# EAGLE board SchematicEagle (EAGLE 6.5.0)
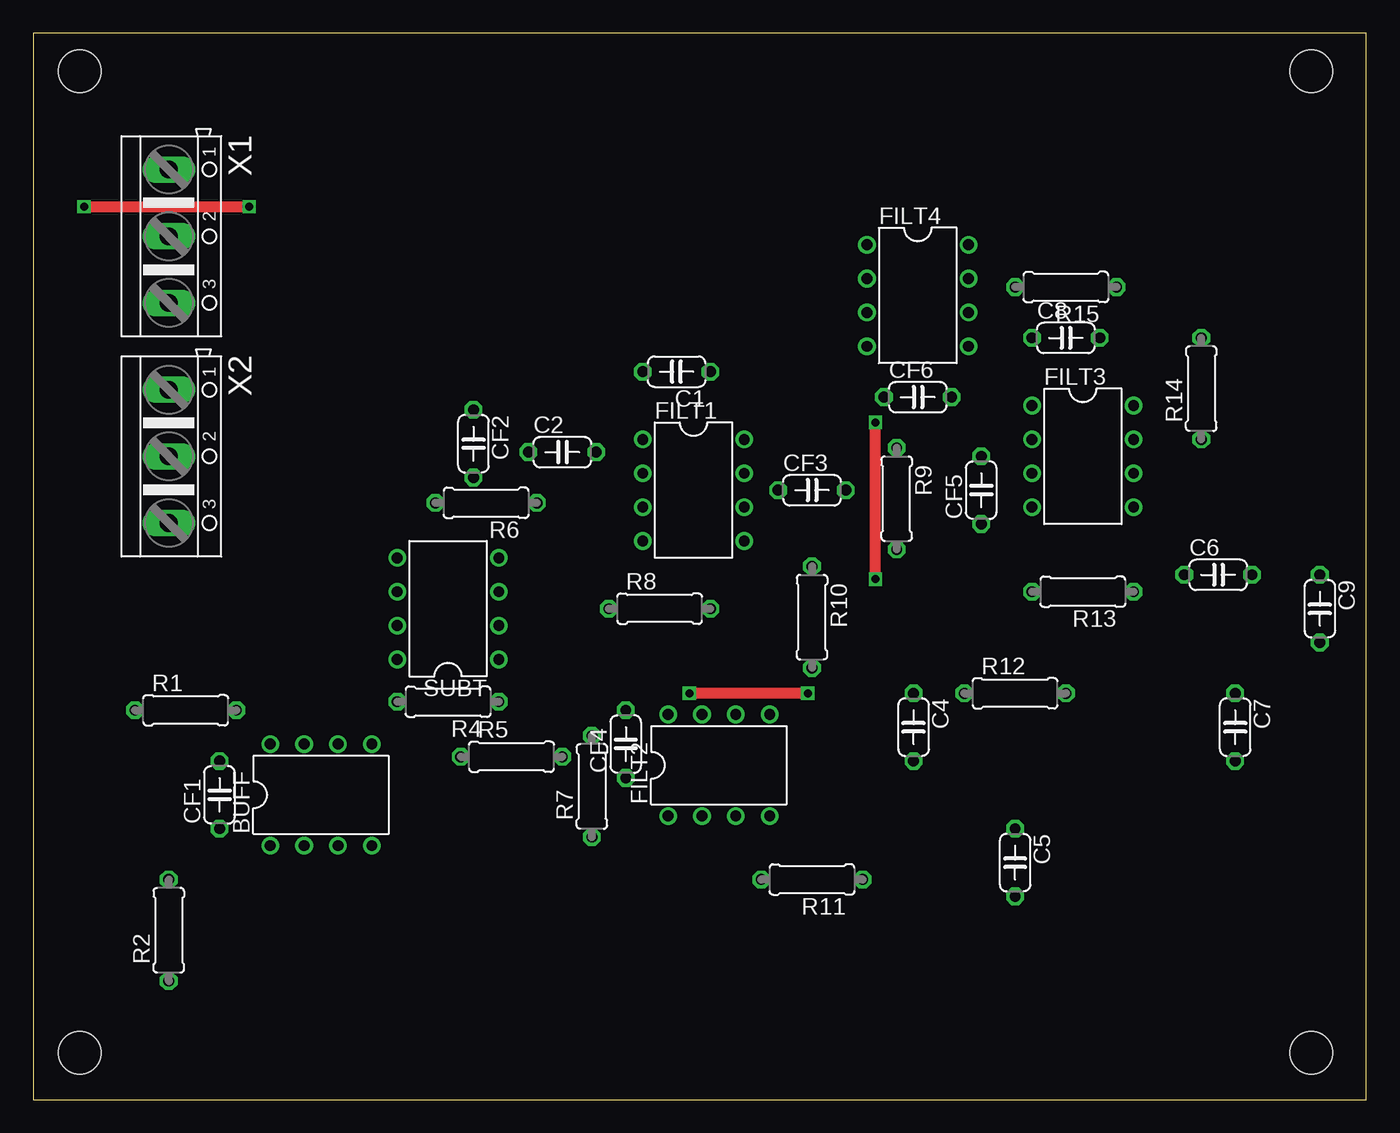
[diagram p0: board, top side]
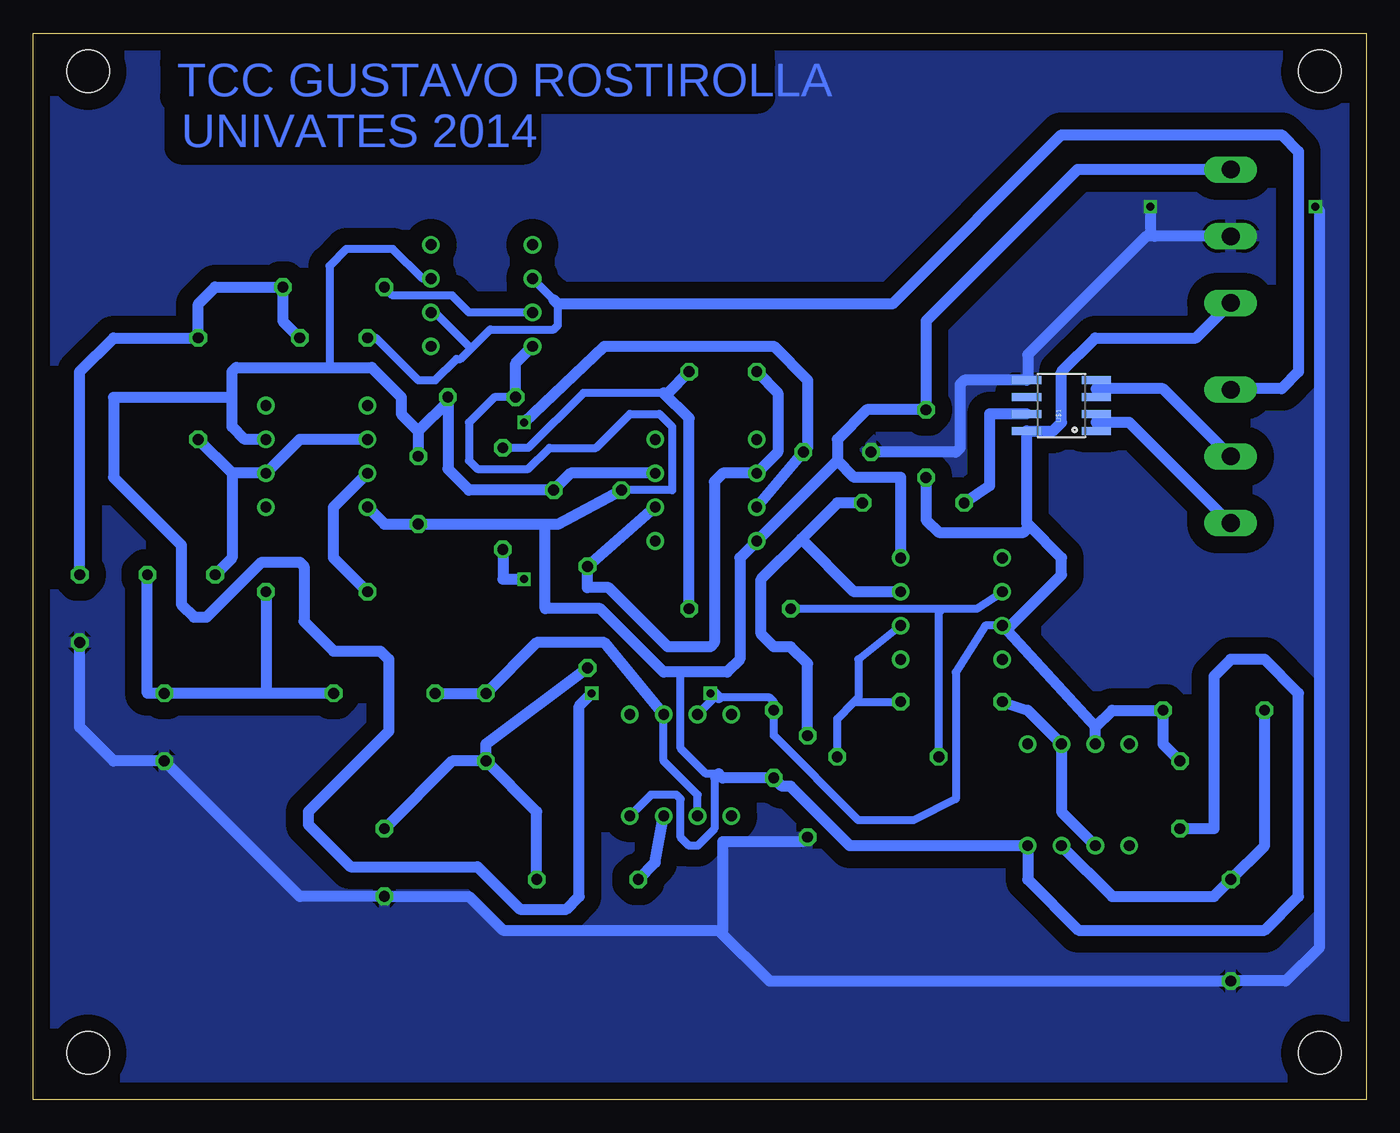
[diagram p1: board, bottom side, seen from below]

Size 100 x 80 mm. Coordinates in mm from the lower left corner, seen from the top.
Outline: 0,0 100,0 100,80 0,80 0,0
Copper layers (1*16): Top 0.035mm / dielectric 1.5mm / Bottom 0.035mm
Design rules "default": minimum track width 10mil, minimum drill 24mil, track to track 8mil, track to pad 8mil, pad to pad 8mil, via to via 8mil, smd to smd 8mil, copper to edge 40mil, drill to drill 8mil, minimum pad ring 10mil, minimum via ring 8mil, stop-mask expansion 4mil, vias tented up to drill 0mil, thermal gap 10mil
Holes 3.2 mm at 3.49,77.15 95.89,77.15 95.89,3.49 3.49,3.49

## Footprints (pad centres in the part's own frame; a part is rotated, then mirrored left to right if it is on the bottom)
DIL08 = drill 0.813 pad 1.27: 1 -3.81,-3.81; 2 -1.27,-3.81; 3 1.27,-3.81; 4 3.81,-3.81; 5 3.81,3.81; 6 1.27,3.81; 7 -1.27,3.81; 8 -3.81,3.81
C050-024X044 = drill 0.813 octagon: 1 -2.54,0; 2 2.54,0
0207/7 = drill 0.813 octagon: 1 -3.81,0; 2 3.81,0
SO08 = smd 0.61 x 2.21: 1 -1.905,-2.616; 2 -0.635,-2.616; 3 0.635,-2.616; 4 1.905,-2.616; 5 1.905,2.616; 6 0.635,2.616; 7 -0.635,2.616; 8 -1.905,2.616
AK500/3 = drill 1.321 long: 1 -5.004,0; 2 0,0; 3 5.004,0

## Placement (x,y rotation side)
BUFF  OP07DN  [DIL08]  21.59,22.86 0 top
C1  15nF  [C050-024X044]  48.26,54.61 180 top
C2  10nF  [C050-024X044]  39.69,48.58 0 top
C4  15nF  [C050-024X044]  66.04,27.94 270 top
C5  10nF  [C050-024X044]  73.66,17.78 270 top
C6  33nF  [C050-024X044]  88.9,39.37 0 top
C7  10nF  [C050-024X044]  90.17,27.94 270 top
C8  330nF  [C050-024X044]  77.47,57.15 0 top
C9  10nF  [C050-024X044]  96.52,36.83 270 top
CF1  100nF  [C050-024X044]  13.97,22.86 90 top
CF2  100nF  [C050-024X044]  33.02,49.21 270 top
CF3  100nF  [C050-024X044]  58.42,45.72 0 top
CF4  100nF  [C050-024X044]  44.45,26.67 90 top
CF5  100nF  [C050-024X044]  71.12,45.72 90 top
CF6  100nF  [C050-024X044]  66.36,52.7 0 top
FILT1  OP07DN  [DIL08]  49.53,45.72 270 top
FILT2  OP07DN  [DIL08]  51.44,25.08 0 top
FILT3  OP07DN  [DIL08]  78.74,48.26 270 top
FILT4  OP07DN  [DIL08]  66.36,60.33 270 top
R1  10K  [0207/7]  11.43,29.21 0 top
R2  10K  [0207/7]  10.16,12.7 90 top
R4  20K  [0207/7]  31.11,29.84 180 top
R5  20K  [0207/7]  35.88,25.72 0 top
R6  20K  [0207/7]  33.97,44.77 180 top
R7  20K  [0207/7]  41.91,23.5 90 top
R8  8,2K  [0207/7]  46.99,36.83 0 top
R9  33K  [0207/7]  64.77,45.09 270 top
R10  15K  [0207/7]  58.42,36.2 270 top
R11  18K  [0207/7]  58.42,16.51 180 top
R12  10K  [0207/7]  73.66,30.48 0 top
R13  12K  [0207/7]  78.74,38.1 180 top
R14  2.2K  [0207/7]  87.63,53.34 90 top
R15  5.6K  [0207/7]  77.47,60.96 180 top
SUBT  OP07DN  [DIL08]  31.11,36.83 90 top
U$1  ACS712  [SO08]  22.86,52.07 90 bottom
X1  [AK500/3]  10.16,64.77 270 top
X2  [AK500/3]  10.16,48.26 270 top

## Library data of the parts
BUFF FILT1-FILT4 SUBT = linear
C1 C2 C4-C9 CF1-CF6 R1 R2 R4-R15 = rcl
U$1 = 1_SparkFun
X1 X2 = con-ptr500; OC_FARNELL: unknown; OC_NEWARK: unknown

## Nets
+IP_S: U$1.1 U$1.2 X2.3
+VCC: BUFF.7 CF1.2 CF2.2 CF3.2 CF4.2 CF5.2 CF6.2 FILT1.7 FILT2.7 FILT3.7 FILT4.7 R1.2 SUBT.7 U$1.8 X1.3
-IP_S: U$1.3 U$1.4 X2.2
-VCC: BUFF.4 CF1.1 CF2.1 CF3.1 CF4.1 CF5.1 CF6.1 FILT1.4 FILT2.4 FILT3.4 FILT4.4 SUBT.4 X1.1
GND: C2.1 C5.2 C7.2 C9.2 R2.1 R7.1 U$1.5 X1.2
IN_F: R5.1 R8.1 SUBT.6
N$1: BUFF.3 R1.1 R2.2
N$2: C1.1 R8.2 R9.1
N$3: R4.1 R5.2 SUBT.2
N$4: C2.2 FILT1.3 R9.2
N$5: R6.1 R7.2 SUBT.3
N$6: C1.2 FILT1.2 FILT1.6 R10.1
N$7: BUFF.2 BUFF.6 R4.2
N$8: C4.2 C5.1 R10.2 R11.1
N$9: C4.1 FILT2.2 FILT2.6 R12.1
N$10: FILT2.3 R11.2
N$11: C6.2 C7.1 R12.2 R13.1
N$12: C6.1 FILT3.2 FILT3.6 R14.1
N$13: FILT3.3 R13.2
N$15: C8.2 C9.1 R14.2 R15.1
N$17: FILT4.3 R15.2
OUT_F: C8.1 FILT4.2 FILT4.6 X2.1
OUT_I: R6.2 U$1.7

## Tracks (layer width: path | path; a pad name or v marks a point on that pad's centre or on a via)
+IP_S
  Bottom 0.61: U$1.2 20.24,50.8 U$1.1
  Bottom 0.813: X2.3 10.24,43.26 17.78,50.8 20.24,50.8
+VCC  (via drill 0.6 pad 0.61)
  Top 0.813: v58.1,30.48 v49.21,30.48
  Bottom 0.61: FILT4.7 70.8,61.59 73.03,63.82 76.52,63.82 77.79,62.55 77.79,54.93 | SUBT.7 28.57,35.56 30.8,32.07 30.8,22.54 33.97,20.95 38.1,20.95 44.45,27.3 CF4.2 44.45,29.84 44.77,30.16 48.58,30.16 48.9,30.16 FILT2.7 | U$1.8 25.48,48.65 25.4,48.58
  Bottom 0.813: CF1.2 15.24,26.67 R1.2 19.05,29.21 20.32,27.94 | BUFF.7 20.32,27.94 | 20.32,27.94 SUBT.7 26.67,35.56 22.86,39.37 22.86,40.64 25.24,43.02 | 25.24,43.02 25.48,43.26 U$1.8 23.5,50.16 22.86,50.8 22.86,54.61 20.32,57.15 12.78,57.15 X1.3 | FILT3.7 84.14,49.53 85.09,50.48 85.09,52.7 | 85.09,52.7 85.09,54.61 84.77,54.93 77.79,54.93 74.61,54.93 72.39,52.7 72.39,51.44 71.12,50.16 | 71.12,50.16 CF5.2 | 71.12,50.16 68.9,52.39 CF6.2 68.9,47.31 67.31,45.72 CF3.2 59.69,46.99 FILT1.7 | CF2.2 33.02,43.5 32.07,42.55 25.72,42.55 25.24,43.02 | 85.09,52.7 93.98,52.7 93.98,46.67 88.9,41.59 88.9,37.15 87.95,36.2 87,36.2 82.87,40.32 80.01,40.32 79.69,40.01 79.69,35.88 77.47,33.66 73.98,33.66 73.34,33.02 73.34,27.62 79.38,21.59 79.38,20.64 76.2,17.46 66.67,17.46 63.5,14.29 60.01,14.29 59.05,15.24 59.05,29.53 v58.1,30.48 | v49.21,30.48 48.9,30.48 48.58,30.16
-IP_S
  Bottom 0.61: U$1.4 20.24,53.34 U$1.3
  Bottom 0.813: X2.2 15.24,53.34 20.24,53.34
-VCC
  Bottom 0.61: CF6.1 65.41,52.7 67.31,50.8 67.31,47.94 66.67,47.31 62.87,47.31 61.28,48.9 57.78,48.9 55.24,51.44 53.02,51.44 52.07,50.48 52.07,45.72 CF3.1 | FILT2.4 53.66,22.86 51.75,22.86 51.44,22.54 51.44,19.68 50.8,19.05 50.16,19.05 48.9,20.32 48.9,24.13 48.58,24.45 49.53,24.45 51.44,26.35 51.44,32.07
  Bottom 0.813: CF1.1 11.43,20.32 11.43,31.75 10.16,33.02 7.62,33.02 5.08,30.48 5.08,15.24 7.62,12.7 21.59,12.7 25.4,16.51 BUFF.4 38.73,19.05 43.18,23.5 43.81,23.5 CF4.1 48.26,24.13 48.58,24.45 | X1.1 21.67,69.77 33.02,58.42 CF2.1 37.47,51.75 39.69,49.53 39.69,47.94 | FILT3.4 73.66,43.18 CF5.1 61.59,43.18 | 61.59,43.18 60.64,43.18 CF3.1 | CF6.1 63.82,55.24 FILT4.4 | 61.59,43.18 61.59,36.83 57.47,36.83 52.7,32.07 51.44,32.07 47.94,32.07 46.99,33.02 46.99,40.64 FILT1.4 39.69,47.94 | SUBT.4 34.92,46.67 38.42,46.67 39.69,47.94
GND  (via drill 0.6 pad 0.61)
  Top 0.813: v3.81,66.99 v16.19,66.99
  Bottom 0.813: X1.2 15.88,64.77 | 15.88,64.77 16.51,64.77 25.4,55.88 25.4,54.05 U$1.5 30.16,53.98 30.48,53.66 30.48,48.9 30.8,48.58 C2.1 | C9.2 96.52,27.94 93.98,25.4 C7.2 80.01,15.24 C5.2 67.31,15.24 64.77,12.7 48.58,12.7 | 48.58,12.7 48.26,12.7 48.26,19.37 42.23,19.37 R7.1 | 48.58,12.7 44.77,8.89 R2.1 6.03,8.89 3.49,11.43 3.49,66.67 v3.81,66.99 | v16.19,66.99 16.19,65.09 15.88,64.77
  pour Bottom (isolate 1.27): 0,80.01 100.01,80.01 100.01,0 0,0
IN_F
  Bottom 0.61: R8.1 31.75,36.83 | 31.75,36.83 29.21,36.83 SUBT.6 | R5.1 32.07,36.51 31.75,36.83
N$1
  Bottom 0.813: R1.1 7.62,19.05 R2.2 11.43,15.24 19.05,15.24 BUFF.3
N$2
  Bottom 0.61: 52.7,53.02 58.74,53.02 62.87,48.9 R9.1
  Bottom 0.813: C1.1 52.39,53.02 52.7,53.02 50.8,51.12 R8.2
N$3
  Bottom 0.61: R5.2 39.69,28.57 38.42,29.84 | 38.42,29.84 R4.1 | SUBT.2 38.1,33.02 38.1,30.16 38.42,29.84
N$4  (via drill 0.6 pad 0.61)
  Top 0.813: v63.18,39.05 v63.18,50.8
  Bottom 0.813: FILT1.3 C2.2 41.91,48.9 41.91,53.98 44.45,56.52 57.15,56.52 v63.18,50.8 | R9.2 64.77,39.05 v63.18,39.05
N$5
  Bottom 0.813: R7.2 41.91,32.7 43.18,33.97 44.45,33.97 45.4,34.92 45.4,39.05 42.39,42.07 | R6.1 39.69,44.77 42.39,42.07 | SUBT.3 38.42,38.1 42.39,42.07
N$6
  Bottom 0.813: C1.2 44.13,53.02 44.13,48.58 FILT1.2 48.26,46.99 48.9,46.35 48.9,34.29 49.21,33.97 52.39,33.97 56.83,38.42 58.42,38.42 R10.1 FILT1.6
N$7
  Bottom 0.813: R4.2 25.4,29.21 BUFF.6 22.86,21.59 BUFF.2
N$8
  Bottom 0.813: C4.2 68.58,25.4 C5.1 | C4.2 66.04,26.67 R10.2 | R11.1 62.23,21.59 C4.2
N$9
  Bottom 0.61: FILT2.2 50.16,22.86 52.7,25.4 FILT2.6
  Bottom 0.813: R12.1 C4.1 62.23,34.29 57.15,34.29 FILT2.6
N$10
  Bottom 0.813: R11.2 53.34,17.78 FILT2.3
N$11
  Bottom 0.813: R12.2 82.55,30.48 | 82.55,30.48 C7.1 91.44,30.48 C6.2 | R13.1 82.55,30.48
N$12
  Bottom 0.813: FILT3.2 80.01,49.53 FILT3.6 85.09,46.99 | 85.09,46.99 R14.1 | 85.09,46.99 85.09,40.64 C6.1
N$13
  Bottom 0.813: R13.2 77.47,40.64 77.47,44.45 FILT3.3
N$15
  Bottom 0.813: C9.1 96.52,54.61 93.98,57.15 R14.2 87.63,59.69 86.36,60.96 R15.1 81.28,58.42 C8.2
N$17
  Bottom 0.61: FILT4.3 67.31,59.05 68.58,60.33 73.03,60.33 R15.2
OUT_F
  Bottom 0.61: C8.1 74.3,57.15 71.12,53.98 69.85,53.98 68.26,55.56 67.94,55.56 67.15,56.36 | 67.15,56.36 65.72,57.78 60.96,57.78 60.64,58.1 60.64,59.69 | 60.96,60.01 FILT4.2 | FILT4.6 69.85,59.05 67.15,56.36
  Bottom 0.813: X2.1 10.08,53.34 6.35,53.34 5.08,54.61 5.08,71.12 6.35,72.39 22.86,72.39 35.56,59.69 60.64,59.69 60.96,60.01
OUT_I
  Bottom 0.813: U$1.7 28.26,51.44 28.26,46.04 R6.2

## Text on the board
Bottom: TCC GUSTAVO ROSTIROLLA | UNIVATES 2014